# Altium PCB Airbrake Motor Controller.PcbDoc (part 2 of 2)
Units mil, origin at the board's own origin, x right, y up, seen from the top; angles counter-clockwise.
Board outline 2250 x 2250 mil, 4 copper layers (Top Layer, Layer 1, Layer 2, Bottom Layer), stack 23.756 mil thick; 112 components, 86 nets, 376 pads, 165 vias.
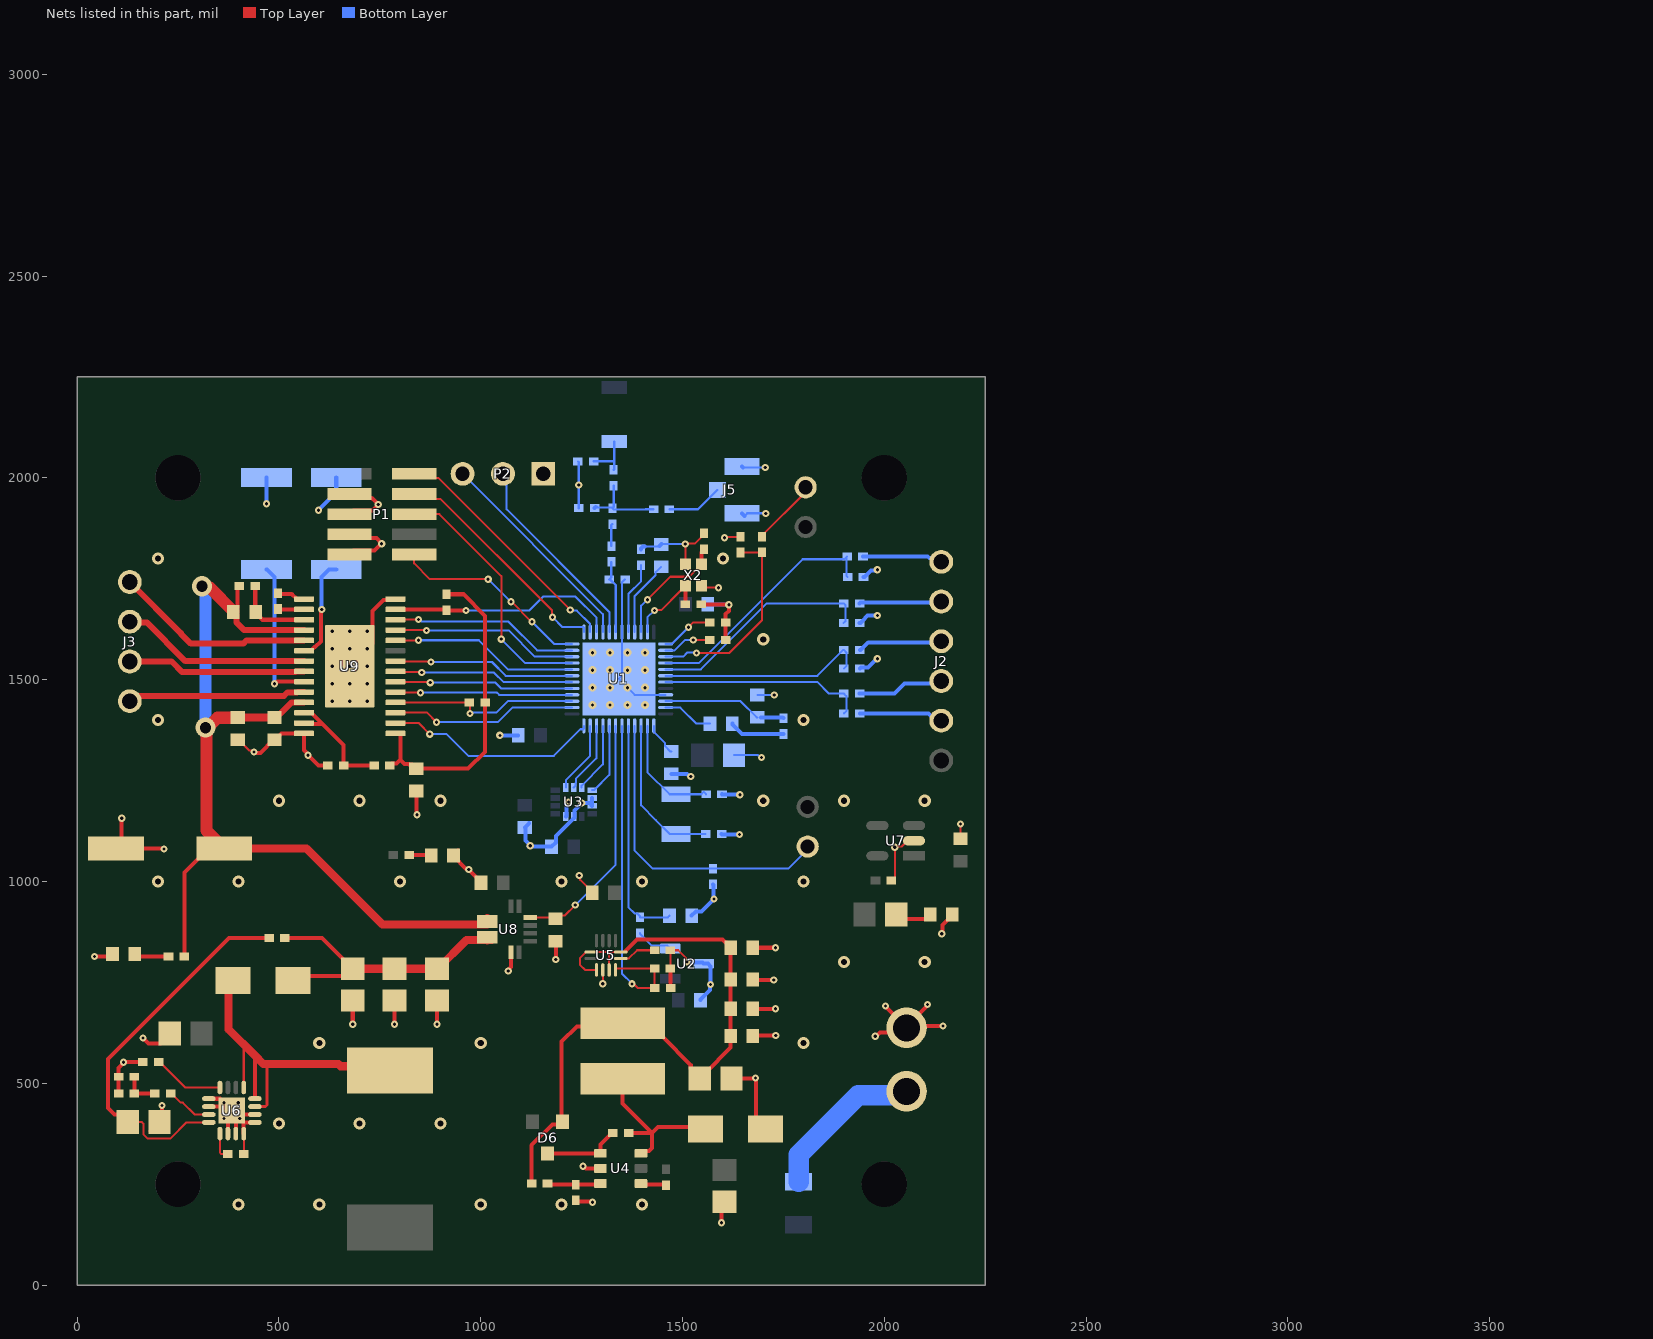
[diagram p4: the nets of this part, all layers, seen from the top]

## Via types
v1: diameter 18, hole 8, Top Layer to Bottom Layer, tented both sides, 97 vias
v2: diameter 19.68, hole 7.87, Top Layer to Bottom Layer, tented both sides, 31 vias
v3: diameter 30, hole 15, Top Layer to Bottom Layer, tented both sides, 30 vias
v4: diameter 50, hole 28, Top Layer to Bottom Layer, tented both sides, 5 vias
v5: diameter 18, hole 10, Top Layer to Bottom Layer, tented both sides, 2 vias

## Nets (pads, with @x,y where several pads share a name; then routed paths per layer and width w, separated by ;. In a path a pad name is that pad's centre, name@x,y a point inside that pad or via, vN(x,y) a via of type N, cw(c..) or ccw(c..) an arc to the next point about the centre after c; other vN are vias at no path point) (continued)
12V0: C39.1 C40.1 C41.2 C44.2 R21.2 R26.1 U8.1 U8.2 U9.4 U9.11 | length 2380.1
  Top Layer w10: R21.2@265.71,810.11 R21.2@265.71,814.09 265.71,1022.69 324.93,1081.91 C40.1@336.15,1081.91 ; C39.1@395.9,1676.95 397.88,1678.94 397.88,1727.49 R26.1@401.93,1731.53
  Top Layer w15: C39.1@395.38,1660.43 395.38,1641.42 413.98,1622.82 U9.4@562.24,1622.82 ; C41.2@489.1,1406.41 497.35,1414.65 502.49,1414.65 530.91,1443.08 561.63,1443.08 U9.11@562.24,1443.69
  Top Layer w20: C40.1@336.15,1081.91 C40.1@364.43,1081.91 567.86,1081.91 756.62,893.15 U8.2@1016.18,893.15 U8.1@1016.18,908.9 ; C44.2@397.93,1406.41 C41.2@489.1,1406.41
  Top Layer w30: v4(309.34,1731.61) 313.17,1727.78 329.02,1727.78 387.14,1669.66 C39.1@387.14,1667.7 ; C40.1@364.43,1081.91 320.43,1125.91 320.43,1373.16 318.1,1375.49 v4(318.1,1381.17) 323.52,1381.17 348,1405.66 397.18,1405.66 C44.2@397.93,1406.41
  Bottom Layer w30: v4(309.34,1731.61) 309.34,1726.2 318.1,1717.44 v4(318.1,1381.17)
"Buck Out": C23.1 C25.2 C26.2 C27.2 C28.2 D6.1 L5.2 R15.1 U5.1 U5.3 U5.6 U5.11 | length 1673.1
  Top Layer w5: U5.11@1260.68,824.95 1245.66,809.93 1245.66,793.45 1258.46,780.65 U5.1@1286.69,780.65 U5.1@1286.69,767.43 ; U5.11@1273.9,824.95 1318.19,824.95 ; U5.3@1318.19,767.43 U5.3@1318.19,780.65 1318.19,824.95 ; U5.6@1346.04,824.26 U5.6@1346.73,824.95 1318.19,824.95
  Top Layer w10: R15.1@1126.06,251.48 1126.06,346.4 1177.94,398.28 1196.64,398.28 D6.1@1202.83,404.47 ; D6.1@1202.95,404.59 D6.1@1202.83,404.47 ; U5.6@1359.25,828.13 1387.44,856.32 1598.62,856.32 1606.46,848.49 1608.42,848.49 1619.17,837.74 C28.2@1619.17,835.77 C23.1@1619.17,756.91 C27.2@1619.17,684.35 C25.2@1619.17,616.91 1619.17,588.21 1556.86,525.9 1530.85,525.9 1520.31,536.44 1520.31,545.2 1450.98,614.53 1416.61,648.9 L5.2@1351.65,648.9 1343.91,641.16 1238.18,641.16 1200,602.98 1200,407.31 D6.1@1202.83,404.47
CP2: C38.2 U9.2 | length 66
  Top Layer w10: C38.2@497.27,1675.01 497.27,1674 U9.2@562.24,1674
DCC: L4.2 U1.47 | length 126.4
  Bottom Layer w5: U1.47@1458.31,1430.89 1494.75,1430.89 1534.63,1391.01 L4.2@1568.23,1391.01
DEC2: C14.1 U1.32 | length 178.9
  Bottom Layer w5: U1.32@1365.79,1617.9 1366.34,1618.45 1366.34,1635.24 1366.53,1635.44 1366.53,1713.51 1397.28,1744.26 C14.1@1397.28,1783.72
DEC3: C13.1 U1.33 | length 188.9
  Bottom Layer w5: U1.33@1381.53,1617.9 1381.53,1707.3 1433.5,1759.27 1433.5,1766.34 1446.75,1779.59 C13.1@1446.93,1779.59
EA+: J2.3 R2.2 | length 215.3
  Bottom Layer w10: R2.2@1938.54,1465.75 2025.39,1465.75 2049.65,1490 2134.26,1490 J2.3@2140.98,1496.72
EA-: J2.4 R6.2 | length 210.7
  Bottom Layer w10: R6.2@1939.17,1573.62 1941.14,1573.62 1960.12,1592.61 2138.44,1592.61 J2.4@2140.98,1595.14
EB+: J2.5 R3.2 | length 216.5
  Top Layer w10: J2.5@2132.4,1684.98 J2.5@2140.98,1693.57
  Bottom Layer w10: R3.2@1938.54,1688.94 1940.85,1691.25 2138.66,1691.25 J2.5@2140.98,1693.57
EB-: J2.6 R7.2 | length 218.5
  Top Layer w5: J2.6@2130.65,1781.66 J2.6@2140.98,1791.99
  Top Layer w10: J2.6@2137.89,1795.08 J2.6@2140.98,1791.99
  Bottom Layer w10: R7.2@1947.09,1805.67 2107.32,1805.67 2111.63,1801.37 2131.6,1801.37 J2.6@2140.98,1791.99
GND: C1.1 C2.1 C3.1 C4.1 C5.2 C6.1 C7.1 C8.1 C9.2 C10.2 C11.1 C12.1 C13.2 C14.2 C15.2 C16.2 C17.2 C18.2 C19.1 C20.1 C21.1 C23.2 C24.2 C25.1 C26.1 C27.1 C28.1 C29.1 C30.2 C31.2 C32.1 C33.1 C34.2 C35.2 C36.2 C37.2 C40.2 C41.1 C42.2 C43.2 C44.1 C45.1 C46.1 C47.2 D1.2 D2.2 D4.2 D5.2 J2.2 J5.2 J5.3 P1.3 P1.5 P1.7 P1.9 P2.1 R1.2 R4.2 R5.2 R8.2 R9.2 R14.1 R16.1 R17.2 R19.2 R22.1 R23.1 R25.2 R28.2 U1.31 U1.45 U1.49 U2.3 U3.2 U3.3 U3.6 U3.7 U4.2 U5.2 U6.5 U6.6 U6.10 U6.11 U6.12 U6.13 U6.14 U6.17 U7.2 U8.5 U9.14 U9.28 U9.29 X2.2 X2.4 X3.2 | length 6242.7
  Top Layer w5: C44.1@397.93,1351.29 399.9,1351.29 426.79,1324.4 432.43,1324.4 438.38,1318.44 v1@444.96,1318.44 ; R17.2@412.87,325 U6.12@412.87,375.3 ; v2(675.43,1533.25) v2(718.74,1576.56) U9.29@732.13,1589.95 ; v1(1243.85,1014.63) 1246.34,1012.14 1246.34,1003.75 1276.2,973.88 C24.2@1276.2,971.91 ; v1(1302.4,746.38) U5.2@1302.42,780.63 ; R14.1@1470.12,784.66 C29.1@1470.12,829.52 1489.43,829.52 1508.43,810.51 1508.43,802.73 v1(1510.92,800.24) ; X2.4@1507.16,1785.84 1506.88,1786.13 v1(1506.88,1835.95) 1508.12,1837.19 1530.12,1837.19 C12.1@1553.42,1860.5 ; X2.2@1546.53,1732.69 1551.42,1727.8 v1(1589.03,1727.8) ; v1@1605.49,1852.95 R28.2@1641.98,1852.95 ; C33.1@2017.49,1001.91 2018.59,1001.91 2025.93,1009.26 v1(2025.93,1084.86) 2027.48,1086.41 2042.43,1086.41 2056.95,1100.93 U7.2@2073.31,1100.93 ; C32.1@2188.46,1105.52 v1(2188.46,1142.3)
  Top Layer w10: v1(42.93,814.09) 77.76,814.09 D4.2@88.5,824.84 ; C47.2@102.67,474.47 102.67,515.9 C31.2@102.82,516.05 ; C31.2@102.67,516.05 C31.2@102.82,516.05 ; v1(110.43,1156.52) 110.43,1095.91 C40.2@96.43,1081.91 v1@215.43,1081.91 ; C30.2@163.14,552.29 114.85,552.29 v1(114.63,552.07) 114.63,549.91 102.82,538.1 C31.2@102.82,516.05 ; v1(163.14,612.39) 177.08,598.45 206.73,598.45 229.29,621.01 C34.2@229.29,622.98 ; R19.2@181.49,381.13 198.52,398.16 R19.2@198.52,403.69 ; R19.2@204.05,403.69 210,409.64 v1(210,445) ; U6.6@326.26,442.23 U6.17@373.5,442.23 ; U6.5@326.26,461.91 326.61,461.57 354.16,461.57 v1(363.83,451.9) U6.17@373.5,442.23 ; U6.10@373.5,375.3 373.5,432.39 378.42,437.31 U6.17@373.5,442.23 ; U6.11@393.19,375.3 U6.17@393.19,422.54 ; R17.2@410.9,325 R17.2@412.87,325 ; U6.12@412.87,375.3 412.53,375.65 U6.17@412.53,403.21 ; U6.13@440.43,402.86 412.87,402.86 U6.17@412.53,403.21 ; U6.14@440.43,422.54 U6.17@393.19,422.54 ; v1@444.96,1318.44 454.29,1318.44 487.13,1351.29 C41.1@489.1,1351.29 491.07,1351.29 506.69,1366.91 U9.14@562.24,1366.91 562.24,1325.08 572.27,1315.06 v1(572.27,1312.89) 598.24,1286.91 R25.2@620.75,1286.91 ; P1.9@674.88,1810 684.45,1819.57 737.1,1819.57 v1(754.45,1836.91) 754.45,1837.32 741.33,1850.43 684.45,1850.43 P1.7@674.88,1860 ; P1.5@674.88,1910 684.45,1919.57 731.51,1919.57 v1(746.17,1934.23) 731.44,1948.97 730.66,1948.97 729.2,1950.43 724.8,1950.43 715.24,1960 P1.3@674.88,1960 ; v1(682.87,646.36) C43.2@682.87,704.94 ; U9.29@732.13,1589.95 732.13,1670.65 759.17,1697.7 786.73,1697.7 U9.28@788.62,1699.59 ; v1(786.05,646.36) C42.2@786.05,704.94 ; v1@840.43,1171.91 C45.1@840.43,1224.35 ; v1(891.53,646.36) C35.2@891.53,704.94 ; D1.2@943.29,1077.24 932.54,1066.49 D1.2@932.54,1064.52 932.54,1062.55 v1@963.97,1031.13 ; v1(970.5,1029.59) 970.5,1028.81 1000.43,998.88 C36.2@1000.43,996.91 ; v1(1068.04,778.13) 1068.04,780.29 1075.24,787.48 U8.5@1075.24,824.26 ; C37.2@1185.28,852.15 1186.12,851.31 v1(1186.12,806.36) ; R16.1@1235.43,209.61 1238.15,206.89 1275.24,206.89 v1(1276.77,205.36) ; v1(1253.36,294.1) 1255.53,294.1 1260.75,288.88 U4.2@1296.46,288.88 ; R14.1@1470.12,784.66 1470.55,784.23 1470.55,736.84 C46.1@1470.98,736.4 ; C11.1@1546.53,1686.76 1546.99,1686.3 1614.33,1686.3 v1(1614.78,1685.85) 1614.78,1670.25 1606.73,1662.2 C9.2@1606.73,1598.37 ; C12.1@1553.42,1860.5 C12.1@1553.42,1862.46 ; v1(1596.57,154.59) 1596.57,202.44 C21.1@1604.27,210.14 ; v1(1604.05,1851.51) v1@1605.49,1852.95 ; C26.1@1617.68,511.91 1681.71,511.91 1681.99,511.63 1681.99,410.36 D2.2@1705.43,386.91 ; R28.2@1641.98,1852.95 R28.2@1643.42,1854.39 ; C25.1@1674.29,616.91 1675.86,618.49 v1(1731.09,618.49) ; C27.1@1674.29,684.35 v1(1730.43,684.35) ; C23.2@1674.29,756.91 1675.63,755.57 v1(1726.09,755.57) ; C28.1@1674.29,835.77 v1(1730.43,835.77) ; v1(1977.73,616.36) 1979.9,616.36 1989.8,626.26 2043.78,626.26 X3.2@2055,637.48 ; v1@1980.57,1551.56 v1(1982.73,1551.56) ; v1@1982.56,1658.74 v1(1982.73,1658.92) ; v1@1982.56,1772.09 v1(1982.73,1772.27) ; v1(2002.75,691.36) 2002.75,690.54 2055,638.3 X3.2@2055,637.48 ; v1(2107.12,695) 2107.12,692.84 2055,640.71 X3.2@2055,637.48 ; J2.2@2133.5,1405.77 J2.2@2140.98,1398.29 ; v1(2142.51,870.45) 2144.04,871.98 2144.04,891.67 2168.54,916.16 D5.2@2168.54,918.13 ; v1(2145.43,641.91) 2075.45,641.91 2071.02,637.48 X3.2@2055,637.48 ; U6.17@393.19,422.54 v1(402.86,412.87) U6.17@412.53,403.21
  Bottom Layer w5: C2.1@1240.66,2041.01 C2.1@1242.63,2039.04 ; C3.1@1357.91,1748.32 1357.38,1748.32 1350.04,1740.97 U1.31@1350.04,1617.9 1350.04,1509.63 U1.49@1342.16,1501.76 v2(1363.82,1480.1) 1381.53,1462.39 U1.45@1458.31,1462.39 ; 1407.98,1830.97 1406.92,1829.91 1442.13,1829.91 C13.2@1446.93,1834.7 ; C13.2@1448.18,1835.95 v1(1506.88,1835.95) ; C16.2@1627.28,1312.78 1686.46,1312.78 1692.01,1307.23 v1(1695.53,1307.23) ; C8.1@1685.43,1461.91 v1(1726.95,1461.91)
  Bottom Layer w5.78: C1.1@1242.63,1924.97 C2.1@1242.63,2039.04 ; J5.2@1649.24,2025.65 v1(1704.9,2025.65) ; J5.3@1653.56,1905.19 1660.3,1911.93 v1(1706.42,1911.93)
  Bottom Layer w10: v1(469.05,1935.94) R23.1@469.05,2001.2 ; v1(598.31,1920) 641.97,1963.66 R22.1@641.97,2001.2 ; v1(1047.41,1361.91) C10.2@1092.87,1361.91 ; v1@1118.08,1086.19 C20.1@1175.31,1086.19 1186.06,1096.93 1186.06,1112.19 1232.32,1158.45 1232.32,1175.54 1250.12,1193.34 v1(1250.12,1194.23) 1269.04,1194.23 U3.3@1276.2,1187.07 U3.2@1276.2,1206.76 ; C19.1@1119.87,1144.18 C19.1@1109.12,1133.43 1111.09,1131.46 1111.09,1101.9 1122.48,1090.52 v1(1122.48,1088.35) ; U3.7@1210.75,1160.99 1211.92,1162.16 1211.92,1189.04 1217.64,1194.75 v1(1217.64,1196.91) ; C14.2@1397.28,1823.1 1397.28,1825.06 1402.13,1829.91 C14.2@1406.92,1829.91 ; C13.2@1443.2,1830.97 C13.2@1448.18,1835.95 ; C4.1@1472.16,1266.76 1511.38,1266.76 1518.27,1259.87 v1(1520.43,1259.87) ; v1(1510.92,800.24) 1512.45,798.71 1550.02,798.71 U2.3@1552.26,796.48 1562.71,796.48 1569.52,789.66 v1(1569.52,744.61) 1567.99,743.08 1567.99,731.51 1544.45,707.98 C18.2@1544.45,706.01 ; C17.2@1522.73,915.12 1533.33,925.72 1546.81,925.72 1577.46,956.36 v1(1578.02,956.36) 1576.73,957.66 1576.73,990.93 1575.43,992.23 R1.2@1575.43,992.54 ; C15.2@1562.28,1686.76 1563.19,1685.85 v1(1614.78,1685.85) ; C6.1@1596.73,1117.62 1597.46,1116.89 1640.29,1116.89 v1(1641.02,1116.16) ; C7.1@1597.76,1216.05 1598.48,1215.32 1641.31,1215.32 v1(1642.04,1214.59) ; J5.3@1646.83,1911.93 J5.3@1653.56,1905.19 ; J5.2@1646.83,2028.07 J5.2@1649.24,2025.65 ; R5.2@1938.54,1640.59 1940.51,1640.59 1945.35,1645.43 1945.35,1645.66 1958.43,1658.74 v1@1982.56,1658.74 ; R4.2@1939.17,1416.1 2109.91,1416.1 2127.72,1398.29 J2.2@2140.98,1398.29 ; R8.2@1939.17,1527.32 1942.02,1530.17 1959.18,1530.17 v1@1980.57,1551.56 ; R9.2@1948.38,1753.94 1950.35,1753.94 1967.15,1770.74 1981.2,1770.74 v1@1982.56,1772.09
  other v1: 363.66,412.87 399.09,451.9 1680.59,513.03 215.43,1080.52 841.95,1165.42 438.38,1321.01 1242.63,1982.01
  other v2: 1277.2,1436.8 1320.51,1436.8 1363.82,1436.8 1407.13,1436.8 632.13,1446.64 675.43,1446.64 718.74,1446.64 1277.2,1480.1 1320.51,1480.1 1407.13,1480.1 632.13,1489.95 675.43,1489.95 718.74,1489.95 1277.2,1523.41 1320.51,1523.41 1363.82,1523.41 1407.13,1523.41 632.13,1533.25 718.74,1533.25 1277.2,1566.72 1320.51,1566.72 1363.82,1566.72 1407.13,1566.72 632.13,1576.56 675.43,1576.56 632.13,1619.87 675.43,1619.87 718.74,1619.87
  other v3: 400,200 600,200 1000,200 1200,200 1400,200 500,400 700,400 900,400 600,600 1000,600 1800,600 1900,800 2100,800 200,1000 400,1000 800,1000 1200,1000 1400,1000 1800,1000 500,1200 700,1200 900,1200 1700,1200 1900,1200 2100,1200 200,1400 1800,1400 1700,1600 200,1800 1600,1800
NetANT1_1: ANT1.1 C2.2 L2.2 | length 120.8
  Bottom Layer w5.78: C2.2@1280.03,2041.01 1330.43,2041.01 ; L2.2@1329.47,2019.97 1330.43,2020.94 1330.43,2041.01 ; ANT1.1@1330.43,2089.98 1330.43,2041.01
NetC1_2: C1.2 L2.1 R31.1 R32.2 | length 208.1
  Bottom Layer w5.78: C1.2@1283.49,1926.46 1324.93,1926.46 R32.2@1326.42,1924.97 ; L2.1@1329.47,1980.6 1329.47,1928.02 R32.2@1326.42,1924.97 ; R31.1@1428.23,1922.2 1408.59,1922.2 1407.98,1921.6 1329.79,1921.6 R32.2@1326.42,1924.97
  Bottom Layer w10: C1.2@1282,1924.97 C1.2@1284.98,1927.95
NetC3_2: C3.2 L1.1 U1.30 | length 181.5
  Bottom Layer w5.78: C3.2@1318.54,1748.32 1323.56,1753.34 L1.1@1323.56,1791.6 ; C3.2@1320.51,1748.32 1334.29,1734.54 U1.30@1334.29,1617.9
NetC4_2: C4.2 U1.1 | length 82.9
  Bottom Layer w5: U1.1@1428.78,1385.61 1428.78,1370.85 1456.95,1342.68 1456.95,1335.12 1470.2,1321.87 C4.2@1472.16,1321.87
NetC5_1: C5.1 U1.37 | length 131.2
  Top Layer w5: v1(1515.04,1629.95) 1526.85,1641.76 C5.1@1567.36,1641.76
  Bottom Layer w5: U1.37@1458.31,1588.37 1473.27,1588.37 1514.84,1629.95 v1(1515.04,1629.95)
NetC8_2: C8.2 L3.1 U1.46 | length 300.2
  Bottom Layer w5: U1.46@1458.31,1446.64 1643.62,1446.64 1683.46,1406.8 C8.2@1685.43,1406.8
  Bottom Layer w10: C8.2@1694.25,1406.6 1748.09,1406.6 L3.1@1750,1404.68
NetC9_1: C9.1 U1.38 | length 119.7
  Top Layer w5: v1(1526.42,1598.37) C9.1@1567.36,1598.37
  Bottom Layer w5: U1.38@1458.31,1572.62 1480.57,1572.62 1506.32,1598.37 v1(1526.42,1598.37)
NetC17_1: C17.1 R10.2 U1.5 | length 564.5
  Bottom Layer w5: U1.5@1365.79,1385.61 1365.79,935.95 1381.22,920.52 1387.66,920.52 1395,913.17 R10.2@1395,911.21 1463.7,911.21 C17.1@1467.62,915.12
NetC22_1: C22.1 D2.1 L5.1 U4.6 | length 433.6
  Top Layer w10: L5.1@1351.65,511.1 1351.65,449.91 1424.64,376.91 ; C22.1@1366.34,376.91 1424.64,376.91 ; U4.6@1396.85,326.28 1402.68,332.11 1417.44,332.11 1424.64,339.32 1424.64,376.91 ; D2.1@1556.43,386.91 1551.43,391.91 1439.64,391.91 1424.64,376.91
NetC22_2: C22.2 D6.3 U4.1 | length 195.7
  Top Layer w10: D6.3@1165.43,325.73 1165.98,326.28 U4.1@1296.46,326.28 1296.46,348.37 1325,376.91 C22.2@1326.97,376.91
NetC29_2: C29.2 U5.5 | length 92.4
  Top Layer w5: U5.5@1346.73,809.2 1367.12,809.2 1387.44,829.52 C29.2@1430.75,829.52
NetC30_1: C30.1 U6.4 | length 177.3
  Top Layer w5: C30.1@202.51,552.29 203.34,551.47 206.07,551.47 268.07,489.47 U6.4@353.82,489.47
NetC31_1: C31.1 C47.1 R18.2 | length 92.5
  Top Layer w10: C31.1@142.04,516.05 142.19,515.9 142.19,474.62 C47.1@142.04,474.47 R18.2@192.83,474.47
NetC35_1: C35.1 C42.1 C43.1 D3.1 R20.1 U8.3 U8.4 | length 739.6
  Top Layer w10: R20.1@514.8,859.41 607.14,859.41 658.35,808.21 658.35,806.24 680.9,783.68 C43.1@682.87,783.68 664.6,765.41 545.43,765.41 D3.1@534.88,754.86
  Top Layer w20: C43.1@682.87,783.68 C42.1@786.05,783.68 C35.1@893.5,783.68 ; C35.1@891.53,783.68 C35.1@893.5,783.68 ; U8.4@1016.18,853.78 U8.4@1016.18,855.33 ; U8.4@1027.51,856.96 1027.51,855.91 1026.93,855.33 U8.4@1016.18,855.33 ; C35.1@893.5,783.68 965.14,855.33 U8.4@1016.18,855.33
NetC37_1: C37.1 U1.7 U8.10 | length 612.8
  Top Layer w5: U8.10@1122.48,910.87 1181.67,910.87 C37.1@1185.28,907.27 ; C37.1@1187.24,907.27 1195.09,915.11 1207.56,915.11 v1(1233.93,941.48)
  Top Layer w10: C37.1@1185.28,907.27 C37.1@1187.24,907.27
  Bottom Layer w5: v1(1233.93,941.48) 1334.29,1041.84 U1.7@1334.29,1385.61
NetC38_1: C38.1 U9.1 | length 71.1
  Top Layer w10: C38.1@497.27,1714.38 499.27,1712.39 531.73,1712.39 544.53,1699.59 U9.1@562.24,1699.59
NetC39_2: C39.2 R26.2 U9.3 | length 195.3
  Top Layer w10: R26.2@441.3,1731.53 441.3,1666.68 C39.2@442.25,1665.73 ; C39.2@442.25,1667.7 C39.2@442.25,1665.73 ; U9.3@562.24,1648.41 459.57,1648.41 C39.2@442.25,1665.73
NetC46_2: C46.2 R14.2 U1.6 U5.4 | length 859.1
  Top Layer w5: U5.4@1333.94,780.65 1333.94,783.34 1335.26,784.66 R14.2@1430.75,784.66 1430.75,737.27 C46.2@1431.61,736.4 1388.36,736.4 1378.52,746.24 v1(1375,746.24)
  Bottom Layer w5: U1.6@1350.04,1385.61 1350.04,771.21 v1(1375,746.24)
NetD1_1: D1.1 R12.2 | length 55.7
  Top Layer w10: R12.2@822.32,1065.89 876.05,1065.89 D1.1@877.42,1064.52
NetD3_2: D3.2 L6.2 U6.1 U6.15 U6.16 | length 918.3
  Top Layer w7: U6.1@412.87,489.47 412.87,585.22 ; U6.15@440.43,442.23 466.33,442.23 470.43,446.33 470.43,547.89
  Top Layer w10: U6.16@440.43,461.91 440.43,568.6
  Top Layer w20: D3.2@385.88,754.86 375.33,744.31 375.33,633.71 440.43,568.6 461.15,547.89 470.43,547.89 647.11,547.89 652.91,542.09 678.67,542.09 725.75,495 L6.2@775,495
NetD4_1: D4.1 R21.1 | length 86.2
  Top Layer w10: D4.1@142.56,820 148.46,814.09 R21.1@226.34,814.09
NetD5_1: D5.1 R11.1 | length 123.7
  Top Layer w10: R11.1@2029.3,918.13 2040.15,907.28 D5.1@2102.67,907.28 ; D5.1@2102.67,907.28 D5.1@2102.67,907.38 ; D5.1@2102.67,907.28 2113.42,918.03 D5.1@2113.42,918.13 ; D5.1@2102.67,907.38 D5.1@2113.42,918.13 ; D5.1@2102.67,907.38 D5.1@2113.42,918.13
NetF1_2: F1.2 X3.1 | length 399.5
  Bottom Layer w50: F1.2@1787.76,255.59 1787.76,322.76 1935.36,470.36 2045.36,470.36 X3.1@2055,480
NetJ1_2: J1.2 R1.1 U1.4 | length 794.9
  Top Layer w10: J1.2@1810,1086.48 J1.2@1822.18,1086.48
  Bottom Layer w5: U1.4@1381.53,1385.61 1381.53,1076.32 1425.94,1031.91 R1.1@1575.43,1031.91 1762.12,1031.91 1810,1079.79 J1.2@1810,1086.48
NetJ3_1: J3.1 U9.5 | length 499.1
  Top Layer w15: J3.1@130.43,1741.91 257.12,1615.22 257.12,1614.04 282.02,1589.15 411.51,1589.15 419.59,1597.23 U9.5@562.24,1597.23
NetJ3_2: J3.2 U9.7 | length 472.2
  Top Layer w15: J3.2@130.43,1643.48 131.99,1641.93 172.42,1641.93 268.3,1546.05 U9.7@562.24,1546.05
NetJ3_3: J3.3 U9.8 | length 443.6
  Top Layer w15: J3.3@130.43,1545.05 233.94,1545.05 260.49,1518.5 541.33,1518.5 542.68,1519.85 561.63,1519.85 U9.8@562.24,1520.46
NetJ3_4: J3.4 U9.10 | length 441.2
  Top Layer w15: J3.4@130.43,1446.62 142.34,1446.62 155.41,1459.7 426.49,1459.7 426.79,1459.99 512.47,1459.99 521.14,1468.67 545.14,1468.67 545.75,1469.28 U9.10@562.24,1469.28
NetJ4_2: J4.2 R27.1 | length 167
  Top Layer w5: R27.1@1696.57,1854.59 1696.57,1856.56 1805,1964.99 J4.2@1805,1976.64
NetJ5_1: J5.1 R31.2 | length 139
  Bottom Layer w5.78: R31.2@1467.6,1922.2 1538,1922.2 1585.8,1970 J5.1@1586.79,1970
NetL1_2: L1.2 R32.1 | length 55.8
  Bottom Layer w5.78: L1.2@1323.56,1830.97 1323.56,1882.75 R32.1@1326.42,1885.6
NetL3_2: L3.2 L4.1 | length 138.5
  Bottom Layer w10: L4.1@1623.35,1391.01 1623.35,1389.04 1647.07,1365.31 L3.2@1750,1365.31
NetR2_1: R2.1 R4.1 U1.43 | length 508
  Bottom Layer w5: U1.43@1458.31,1493.88 1458.86,1494.43 1475.65,1494.43 1475.85,1494.63 1833.84,1494.63 1862.72,1465.75 R2.1@1899.17,1465.75 1905.75,1459.17 1905.75,1422.05 R4.1@1899.8,1416.1
NetR3_1: R3.1 R5.1 U1.41 | length 560.8
  Bottom Layer w5: U1.41@1458.31,1525.38 1545.59,1525.38 1709.15,1688.94 R3.1@1899.17,1688.94 1903.78,1684.32 1903.78,1645.2 R5.1@1899.17,1640.59
NetR6_1: R6.1 R8.1 U1.42 | length 519.5
  Bottom Layer w5: U1.42@1458.31,1509.63 1833.84,1509.63 1897.83,1573.62 R6.1@1899.8,1573.62 1906.06,1567.36 1906.06,1533.59 R8.1@1899.8,1527.32
NetR7_1: R7.1 R9.1 U1.40 | length 612.9
  Bottom Layer w5: U1.40@1458.31,1541.13 1540.12,1541.13 1797.33,1798.33 1900.37,1798.33 R7.1@1905.75,1803.7 ; R9.1@1909.01,1753.94 1905.75,1757.2 R7.1@1905.75,1803.7 ; R7.1@1905.75,1803.7 R7.1@1907.72,1805.67 R7.1@1905.75,1803.7
NetR10_1: R10.1 U2.2 | length 91.5
  Bottom Layer w5: R10.1@1395,871.84 1395,869.87 1423.69,841.18 1462.28,841.18 U2.2@1469.58,833.88
NetR13_1: R13.1 U4.4 | length 63.6
  Top Layer w10: U4.4@1396.85,251.48 1398.82,249.51 1456.89,249.51 R13.1@1458.86,247.54
NetR15_2: R15.2 R16.2 U4.3 | length 133.1
  Top Layer w10: R15.2@1165.43,251.48 1167.93,248.98 1293.96,248.98 U4.3@1296.46,251.48
NetR17_1: R17.1 U6.9 | length 68.3
  Top Layer w5: U6.9@353.82,375.3 353.82,327.93 356.75,325 R17.1@373.5,325
NetR18_1: R18.1 U6.7 | length 116.1
  Top Layer w5: R18.1@232.2,474.47 234.17,474.47 255.81,452.83 261.69,452.83 261.69,451.85 290.99,422.54 U6.7@326.26,422.54
NetR19_1: R19.1 R20.2 U6.8 | length 956.6
  Top Layer w5: R19.1@125.31,403.69 160.37,403.69 163.99,400.06 163.99,373.88 174.24,363.63 231.68,363.63 270.91,402.86 U6.8@326.26,402.86
  Top Layer w10: R19.1@125.31,403.69 106.75,422.24 92.91,422.24 76.4,438.75 76.4,559.59 376.23,859.41 R20.2@475.43,859.41
NetR22_2: R22.2 U9.6 | length 257.1
  Top Layer w10: U9.6@563.52,1572.91 U9.6@562.24,1571.64 579.96,1571.64 588.66,1580.34 589.82,1580.34 604.41,1594.93 604.41,1672.56 v1(605.85,1674)
  Bottom Layer w10: v1(605.85,1674) 605.85,1753.9 624.58,1772.63 R22.2@641.97,1772.63
NetR23_2: R23.2 U9.9 | length 366.9
  Top Layer w10: v1(489.25,1490) 491.42,1490 496.28,1494.87 U9.9@562.24,1494.87
  Bottom Layer w10: R23.2@469.05,1772.63 470.52,1772.63 489.25,1753.9 v1(489.25,1490)
NetR24_1: R24.1 R25.1 U9.12 U9.13 | length 303.7
  Top Layer w10: U9.13@562.24,1392.5 564.13,1390.61 607.44,1390.61 ; U9.12@562.24,1418.1 579.96,1418.1 607.44,1390.61 ; R24.1@735.75,1286.91 R25.1@660.12,1286.91 660.12,1337.94 607.44,1390.61
NetR27_2: R27.2 R28.1 U1.39 | length 500.4
  Top Layer w5: v1(1534.65,1566.06) 1616.06,1566.06 1696.57,1646.57 R27.2@1696.57,1815.22 1647.56,1815.22 1645.39,1813.05 R28.1@1643.42,1815.02
  Bottom Layer w5: U1.39@1458.31,1556.87 1501.39,1556.87 1512.33,1567.82 1532.89,1567.82 v1(1534.65,1566.06)
NetR29_2: R29.2 U1.27 U9.27 | length 570.6
  Top Layer w10: U9.27@788.62,1674 913.66,1674 R29.2@915.43,1672.23 915.9,1671.76 962.99,1671.76 v1(963.47,1671.28)
  Bottom Layer w5: v1(963.47,1671.28) 1120.05,1671.28 1154.23,1705.46 1234.76,1705.46 1287.05,1653.17 U1.27@1287.05,1617.9
NetR30_2: R30.2 U1.15 U9.18 | length 502.8
  Top Layer w5: U9.18@788.62,1443.69 R30.2@965,1443.69 ; v1(973.6,1416.21) R30.2@973.6,1443.69 ; R30.2@973.6,1449.29 R30.2@973.6,1443.69 ; R30.2@980.94,1451.03 R30.2@973.6,1443.69 ; R30.2@965,1443.69 R30.2@971.63,1443.69 ; R30.2@965,1443.69 968.31,1440.37 R30.2@971.63,1443.69 ; R30.2@971.63,1443.69 R30.2@973.6,1443.69
  Bottom Layer w5: v1(973.6,1416.21) 975.49,1418.1 1038.89,1418.1 1067.43,1446.64 U1.15@1226.02,1446.64
NetU1_8: U1.8 U3.1 | length 179.3
  Bottom Layer w5: U3.1@1276.2,1226.44 1280.63,1226.44 1318.54,1264.35 U1.8@1318.54,1385.61
NetU1_9: U1.9 U3.14 | length 174.6
  Bottom Layer w5: U3.14@1250.12,1232.84 1250.12,1237.27 1302.79,1289.95 U1.9@1302.79,1385.61
NetU1_10: U1.10 U3.13 | length 176.2
  Bottom Layer w5: U3.13@1230.43,1232.84 1234.82,1237.23 1234.82,1243.68 1235.73,1244.59 1235.73,1254.37 1286.3,1304.95 1286.3,1312.82 1287.05,1313.57 U1.10@1287.05,1385.61
NetU1_11: U1.11 U3.12 | length 177.9
  Bottom Layer w5: U3.12@1210.75,1232.84 1210.75,1250.61 1271.3,1311.16 U1.11@1271.3,1385.61
NetU1_12: U1.12 U9.16 | length 536.7
  Top Layer w5: U9.16@789.92,1391.21 791.22,1392.5 846.27,1392.5 v1(873.75,1365.02)
  Top Layer w10: U9.16@788.62,1392.5 U9.16@789.92,1391.21
  Bottom Layer w5: v1(873.75,1365.02) 915.35,1365.02 969.21,1311.16 1181.09,1311.16 1247.04,1377.11 1254.22,1377.11 1255.55,1378.43 U1.12@1255.55,1385.61
NetU1_14: U1.14 U9.17 | length 462.1
  Top Layer w5: U9.17@788.62,1418.1 867.07,1418.1 v1(890.46,1394.71)
  Bottom Layer w5: v1(890.46,1394.71) 1041.92,1394.71 1078.11,1430.89 U1.14@1226.02,1430.89
NetU1_16: U1.16 U9.19 | length 440.3
  Top Layer w5: U9.19@788.62,1469.28 789.45,1468.45 849.94,1468.45 v1(850.76,1467.62)
  Bottom Layer w5: v1(850.76,1467.62) 1040.33,1467.62 1045.57,1462.39 U1.16@1226.02,1462.39
NetU1_17: U1.17 U9.20 | length 444.3
  Top Layer w5: U9.20@788.62,1494.87 789.74,1493.74 873.75,1493.74 v1(874.87,1492.62)
  Bottom Layer w5: v1(874.87,1492.62) 1036.54,1492.62 1051.03,1478.13 U1.17@1226.02,1478.13
NetU1_18: U1.18 U9.21 | length 448.4
  Top Layer w5: U9.21@788.62,1520.46 790.04,1519.04 852.39,1519.04 v1(853.81,1517.62)
  Bottom Layer w5: v1(853.81,1517.62) 1032.76,1517.62 1056.5,1493.88 U1.18@1226.02,1493.88
NetU1_19: U1.19 U9.22 | length 452.5
  Top Layer w5: U9.22@788.62,1546.05 789.82,1544.85 875.64,1544.85 v1(876.84,1543.65)
  Bottom Layer w5: v1(876.84,1543.65) 1027.95,1543.65 1061.96,1509.63 U1.19@1226.02,1509.63
NetU1_20: U1.20 U9.24 | length 467.5
  Top Layer w5: U9.24@788.62,1597.23 788.82,1597.43 845.35,1597.43 v1(845.54,1597.62)
  Bottom Layer w5: v1(845.54,1597.62) 995.18,1597.62 1067.43,1525.38 U1.20@1226.02,1525.38
NetU1_22: U1.22 U9.25 | length 465.2
  Top Layer w5: U9.25@788.62,1622.82 788.72,1622.72 865.43,1622.72 v1(865.43,1621.91)
  Bottom Layer w5: v1(865.43,1621.91) 1069.24,1621.91 1134.28,1556.87 U1.22@1226.02,1556.87
NetU1_23: U1.23 U9.26 | length 469.3
  Top Layer w5: U9.26@788.62,1648.41 788.9,1648.69 845.27,1648.69 v1(845.54,1648.96)
  Bottom Layer w5: v1(845.54,1648.96) 849.06,1648.96 854.5,1643.52 1068.85,1643.52 1139.75,1572.62 U1.23@1226.02,1572.62
nRESET: P1.10 U1.24 | length 495.6
  Top Layer w5: P1.10@835.12,1810 835.12,1787.93 874.05,1749.01 v1(1018.3,1749.01) ; v1(1074.88,1692.78) 1076.34,1692.78 1125.61,1643.52 v1(1127.07,1643.52)
  Bottom Layer w5: v1(1018.3,1749.01) 1018.66,1749.01 v1(1074.88,1692.78) ; v1(1127.07,1643.52) 1182.22,1588.37 U1.24@1226.02,1588.37
RX: P2.3 U1.28 | length 536.2
  Bottom Layer w5: P2.3@955,2010 1302.79,1662.21 U1.28@1302.79,1617.9
SDWIO: P1.2 U1.26 | length 610.4
  Top Layer w5: P1.2@835.12,2010 845.32,1999.8 894.61,1999.8 v1(1221.75,1672.66)
  Bottom Layer w5: v1(1221.75,1672.66) 1223.23,1671.18 1238.25,1671.18 1270.75,1638.68 1270.75,1618.45 U1.26@1271.3,1617.9
SWDCLK: P1.4 U1.25 | length 577.7
  Top Layer w5: P1.4@835.12,1960 847.19,1947.93 900.13,1947.93 1176.77,1671.29 1176.77,1655.7 v1(1177.68,1654.79)
  Bottom Layer w5: v1(1177.68,1654.79) 1178.03,1654.79 1202.66,1630.16 1254.22,1630.16 1255.55,1628.83 U1.25@1255.55,1617.9
SWO: P1.6 U1.21 | length 635.1
  Top Layer w5: P1.6@835.12,1910 897.54,1910 1051.03,1756.51 v1(1051.03,1600.41)
  Bottom Layer w5: v1(1051.03,1600.41) 1110.32,1541.13 U1.21@1226.02,1541.13
TX: P2.2 U1.29 | length 501.3
  Bottom Layer w5: P2.2@1055,2010 1064.37,2000.63 1064.37,1921.84 1318.54,1667.67 U1.29@1318.54,1617.9
V3P3OUT: C45.2 R24.2 R29.1 R30.1 U9.15 | length 794.3
  Top Layer w10: R24.2@775.12,1286.91 779.96,1291.76 790.78,1291.76 800.02,1300.99 801.04,1300.99 ; U9.15@788.62,1366.91 799.15,1366.91 801.04,1365.02 801.04,1300.99 ; C45.2@836.99,1282.92 829.68,1290.22 822.39,1290.22 821.86,1290.75 811.28,1290.75 801.04,1300.99 ; C45.2@840.43,1279.47 968.65,1279.47 1010.43,1321.25 1010.43,1443.12 R30.1@1011,1443.69 1010.43,1444.25 1010.43,1658.26 957.09,1711.6 R29.1@915.43,1711.6
XC1: C12.2 U1.34 X2.1 | length 297.7
  Top Layer w5: v1(1413.03,1698.02) 1469.97,1754.96 1516.63,1754.96 1546.53,1784.86 X2.1@1546.53,1785.84
  Top Layer w10: X2.1@1546.53,1785.84 1547.52,1786.83 1547.52,1815.22 1553.42,1821.13 C12.2@1553.42,1823.09
  Bottom Layer w5: U1.34@1397.28,1617.9 1397.28,1683.13 1412.17,1698.02 v1(1413.03,1698.02)
XC2: C11.2 U1.35 X2.3 | length 207.4
  Top Layer w5: v1(1430.43,1671.05) 1431.84,1672.46 1446.93,1672.46 1494.9,1720.43 1495.89,1720.43 1503.72,1728.26 X2.3@1503.72,1729.25
  Top Layer w10: X2.3@1503.72,1729.25 X2.3@1507.16,1732.69 ; C11.2@1507.16,1686.76 X2.3@1507.16,1730.48
  Bottom Layer w5: U1.35@1413.03,1617.9 1413.03,1654.51 1429.57,1671.05 v1(1430.43,1671.05)
XL1: C7.2 U1.2 X1.1 | length 287.7
  Bottom Layer w5: U1.2@1413.03,1385.61 1413.03,1270.97 1467.95,1216.05 1546.42,1216.05 1552.4,1222.03 C7.2@1558.39,1216.05
XL2: C6.2 U1.3 X1.2 | length 386.7
  Bottom Layer w5: U1.3@1397.28,1385.61 1397.28,1269 1397.28,1188.29 1433.66,1151.91 1467.95,1117.62 X1.2@1483.7,1117.62 C6.2@1557.36,1117.62
pads on no net: ANT1.2 D6.2 P1.8 U1.44 U3.4 U3.9 U3.10 U3.11 U5.12 U7.4 U8.6 U8.7 U8.8 U8.9 U8.11 U9.23
copper on no net: | length 7.5
  Top Layer w5: 3805.23,3047.34 3809.63,3042.95 3809.63,3042.19 3810,3041.81

## Polygon pours and split planes (outlines as drawn)
GND on Bottom Layer "GND_L04_P001" (solid, pour order 1): 0,2250 2250,2250 2250,0 20,0 0,0
GND on Top Layer "GND_L01_P000" (solid, pour order 0): 0,2250 2250,2250 2250,5 2255,0 0,0
GND on Layer 2 (split plane): 2229.9,20.1 20.1,20.1 20.1,2229.9 2229.9,2229.9
3V3 on Layer 1 (split plane): 2229.9,20.1 20.1,20.1 20.1,2229.9 2229.9,2229.9

## Keep-outs
Keep-Out Layer:
  region: 2250,2065 2250,2250 0,2250 0,2065

## Silkscreen, mask and mechanical layers (free items; w line width, h text height)
Top Overlay:
  text "3V3" at 766.52,958.37 h60
  text "5V0" at 1940,795 h60
  text "12V0" at 75,705 h60
  text "GND" at 1837,591.42 h40 r90
  text "7V4" at 1837,408 h40 r90
Bottom Overlay:
  drawing of 3 lines, arcs and shapes, not listed
  text "Airbrake  Motor / Controller Rev:1.0" at 1607.33,50 h60
Outline:
  the board outline again, w47.24

## Text inside footprints (layer, text, board x,y; h text height)
C40: Mechanical 7 "0.335in/8.509mm" at 324.18,1494.41 h25 r180; Mechanical 7 "0.122in/3.099mm" at 446.18,1394.41 h25 r180; Mechanical 7 "0.335in/8.509mm" at 705.43,1094.41 h25 r180; Mechanical 7 "0.366in/9.296mm" at 324.18,794.41 h25 r180; Mechanical 7 "0.043in/1.092mm" at -92.57,1094.41 h25 r180; Mechanical 7 "Alternate 2 Padstyle: OX90Y60D30P" at 642.93,1727.41 h50 r180; Mechanical 7 "Alternate 1 Padstyle: OX60Y90D30P" at 642.93,1627.41 h50 r180; Mechanical 7 "Default Padstyle: RX138Y59D0T" at 592.93,1527.41 h50 r180
J1: Mechanical 7 "9.842519E-02in/2.5mm (2 @ 9.842519E-02in/3mm)" at 1660.2,1416.95 h25 r270; Mechanical 7 "Alt 2 Padstyle: OX90Y60D30P" at 1235.2,1473.2 h50 r270; Mechanical 7 "Alt 1 Padstyle: OX60Y90D30P" at 1335.2,1473.2 h50 r270; Mechanical 7 "Default Padstyle: EX55Y55D35P" at 1535.2,1498.2 h50 r270
J3: Mechanical 7 "0.226in/5.74mm" at 138.79,2393.27 h25 r270; Mechanical 7 "0.134in/3.4mm" at 184.86,2430.77 h25 r270; Mechanical 7 "0in/0mm" at 117.93,1230.27 h25 r270; Mechanical 7 "0.488in/12.395mm" at 694.29,1694.27 h25 r270; Mechanical 7 "0.098in/2.5mm" at 369.29,1798.56 h25 r270; Mechanical 7 "Alt Padstyle 2: OX90Y60D30P" at -646.71,1931.77 h50 r270; Mechanical 7 "Alt Padstyle 1: OX60Y90D30P" at -571.71,1931.77 h50 r270; Mechanical 7 "Right Mtg Padstyle: EX60Y60D30P" at -496.71,1981.77 h50 r270; Mechanical 7 "Left Mtg Padstyle: EX60Y60D30P" at -421.71,1969.27 h50 r270; Mechanical 7 "3rd Mtg Padstyle: EX70Y70D70P" at -346.71,1956.77 h50 r270; Mechanical 7 "2nd Mtg Padstyle: EX70Y70D70P" at -271.71,1956.77 h50 r270; Mechanical 7 "1st Mtg Padstyle: EX91Y91D71P" at -196.71,1956.77 h50 r270; Mechanical 7 "Default Padstyle: EX59Y59D39P" at -121.71,1956.77 h50 r270
J4: Mechanical 7 "9.842519E-02in/2.5mm (2 @ 9.842519E-02in/3mm)" at 1954.8,1646.18 h25 r90; Mechanical 7 "Alt 2 Padstyle: OX90Y60D30P" at 2379.8,1589.93 h50 r90; Mechanical 7 "Alt 1 Padstyle: OX60Y90D30P" at 2279.8,1589.93 h50 r90; Mechanical 7 "Default Padstyle: EX55Y55D35P" at 2079.8,1564.93 h50 r90
R22: Mechanical 7 "0.033in/0.85mm" at 849.96,1867.13 h25 r90; Mechanical 7 "0.248in/6.3mm" at 458.98,1968.16 h25 r90; Mechanical 7 "0.126in/3.2mm" at 654.47,1642.9 h25 r90; Mechanical 7 "Alternate 2 Padstyle: OX90Y60D30P" at 1174.96,2299.41 h50 r90; Mechanical 7 "Alternate 1 Padstyle: OX60Y90D30P" at 1074.96,2299.41 h50 r90; Mechanical 7 "Default Padstyle: RX47p46Y125p98D0T" at 974.96,2324.41 h50 r90
R23: Mechanical 7 "0.033in/0.85mm" at 677.04,1867.13 h25 r90; Mechanical 7 "0.248in/6.3mm" at 286.05,1968.16 h25 r90; Mechanical 7 "0.126in/3.2mm" at 481.55,1642.9 h25 r90; Mechanical 7 "Alternate 2 Padstyle: OX90Y60D30P" at 1002.04,2299.41 h50 r90; Mechanical 7 "Alternate 1 Padstyle: OX60Y90D30P" at 902.04,2299.41 h50 r90; Mechanical 7 "Default Padstyle: RX47p46Y125p98D0T" at 802.04,2324.41 h50 r90